# EAGLE board SCRIPPS_new_board_ (EAGLE 8.2.2)
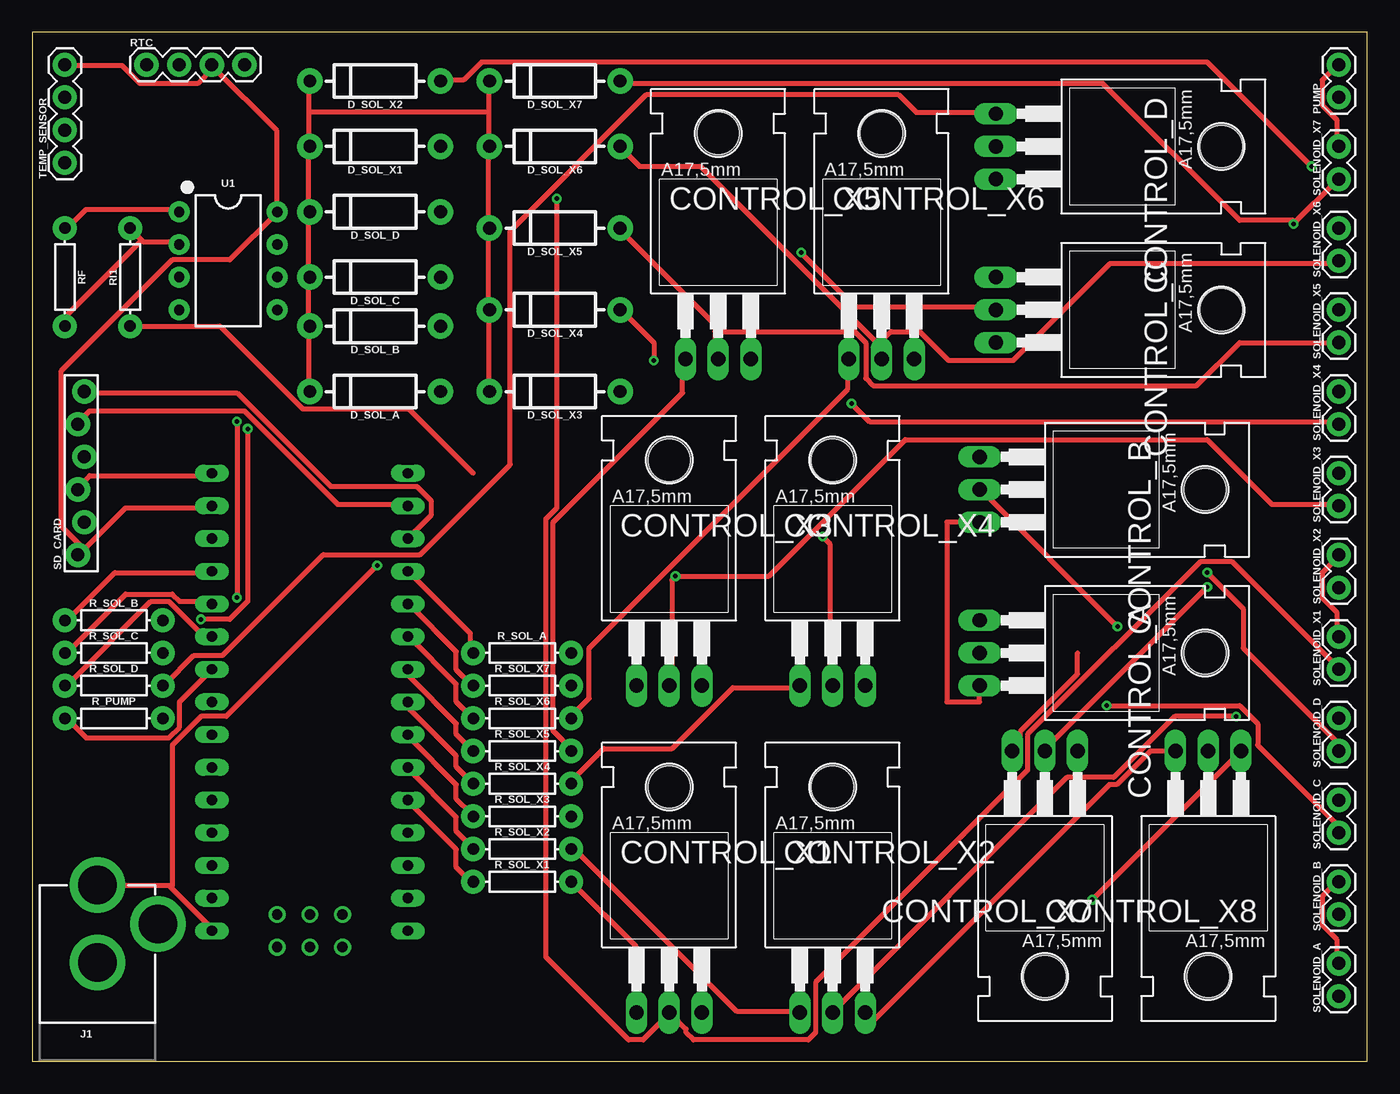
[diagram p0: board, top side]
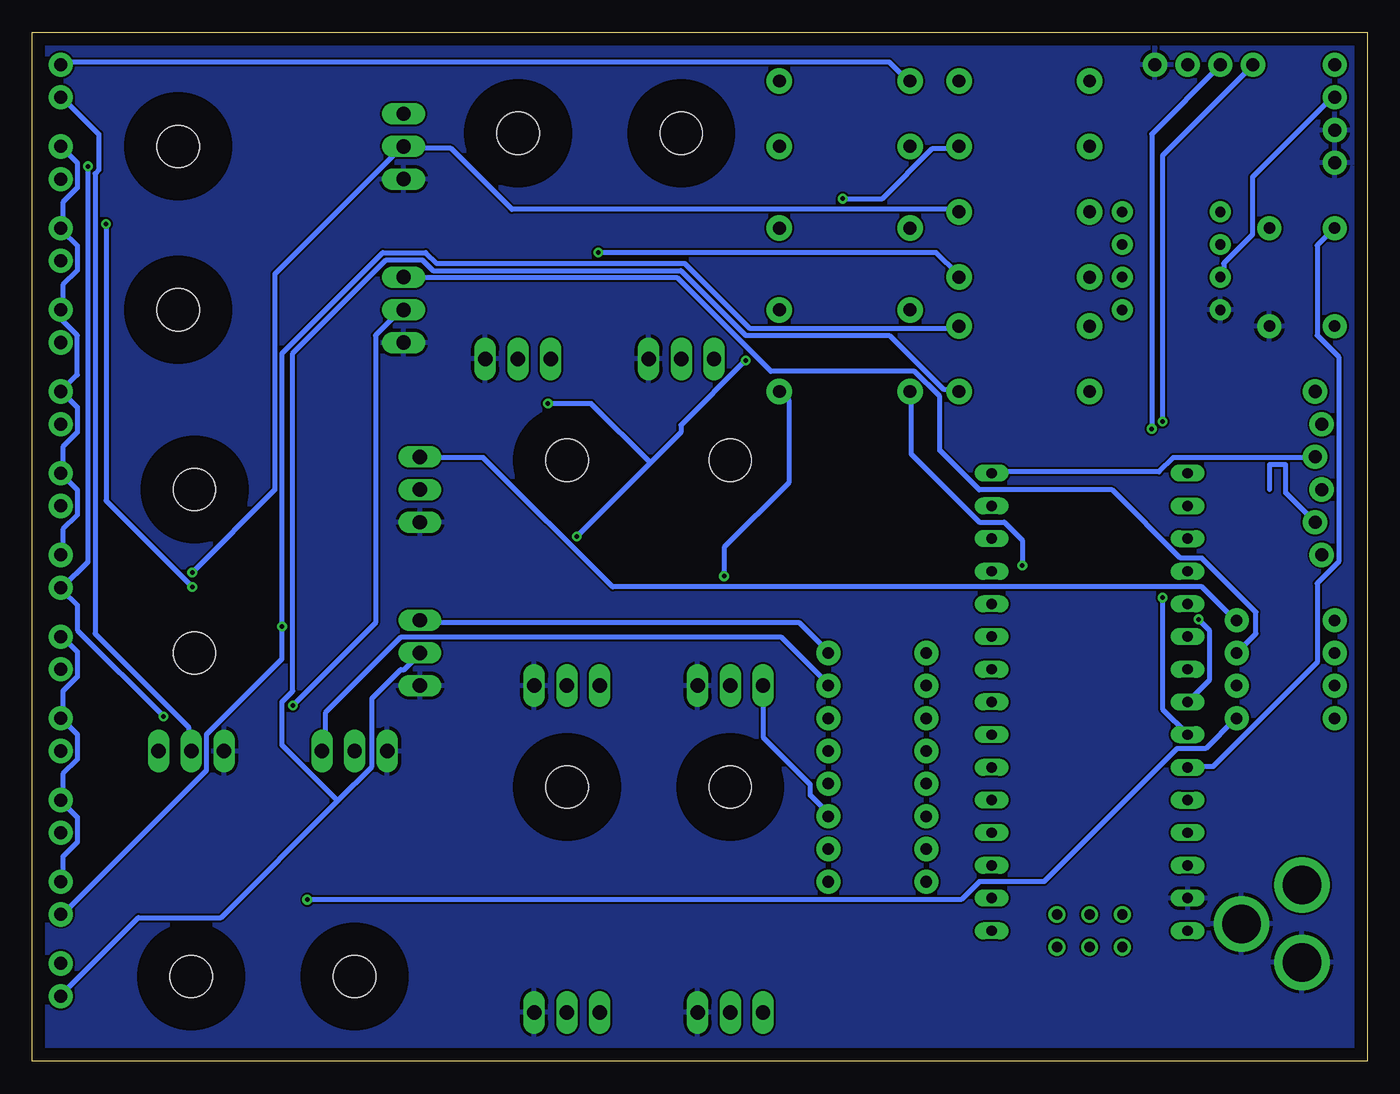
[diagram p1: board, bottom side, seen from below]

Size 103.81 x 80 mm. Coordinates in mm from the lower left corner, seen from the top.
Outline: 0,0 103.81,0 103.81,80 0,80 0,0
Copper layers (1*16): Top 0.035mm / dielectric 1.5mm / Bottom 0.035mm
Design rules "default": minimum track width 6mil, minimum drill 0.35mm, track to track 6mil, track to pad 6mil, pad to pad 6mil, via to via 6mil, smd to smd 6mil, copper to edge 40mil, drill to drill 6mil, minimum pad ring 10mil, minimum via ring 8mil, stop-mask expansion 4mil, vias tented up to drill 0mil, thermal gap 10mil
Net classes: 0 edit1: width 0.406 mm

## Footprints (pad centres in the part's own frame; a part is rotated, then mirrored left to right if it is on the bottom)
TO220AH = drill 1.118 long: B -2.54,-6.35; C 0,-6.35; E 2.54,-6.35 | hole 3.302: 0,11.176
DIODE-1N4001 = drill 1 pad 1.981: A -5.08,0; C 5.08,0
POWER_JACK_PTH = drill 2.997 pad 4.318: GND 0,7.7; GNDBREAK 4.7,10.7; PWR 0,13.7
1X02 = drill 1.016 pad 1.88: 1 0,0; 2 2.54,0
AXIAL-0.3 = drill 0.9 pad 1.88: P$1 -3.81,0; P$2 3.81,0
1X04 = drill 1.016 pad 1.88: 1 0,0; 2 2.54,0; 3 5.08,0; 4 7.62,0
1X06_FEMALE_LOCK.010 = drill 1.016 pad 1.88: 1 0,0.254; 2 2.54,-0.254; 3 5.08,0.254; 4 7.62,-0.254; 5 10.16,0.254; 6 12.7,-0.254
DIP08 = drill 0.813 pad 1.626: 1 -3.81,-3.81; 2 -1.27,-3.81; 3 1.27,-3.81; 4 3.81,-3.81; 5 3.81,3.81; 6 1.27,3.81; 7 -1.27,3.81; 8 -3.81,3.81
NANO = drill 0.8 long: 3.3V -10.16,24.13; 5V -10.16,-1.27; A0 -10.16,19.05; A1 -10.16,16.51; A2 -10.16,13.97; A3 -10.16,11.43; A4 -10.16,8.89; A5 -10.16,6.35; A6 -10.16,3.81; A7 -10.16,1.27; AREF -10.16,21.59; D2 5.08,1.27; D3 5.08,3.81; D4 5.08,6.35; D5 5.08,8.89; D6 5.08,11.43; D7 5.08,13.97; D8 5.08,16.51; D9 5.08,19.05; D10 5.08,21.59; D11 5.08,24.13; D12 5.08,26.67; D13 -10.16,26.67; GND -10.16,-6.35; GND1 5.08,-1.27; RAW -10.16,-8.89; RST -10.16,-3.81; RST1 5.08,-3.81; RX1 5.08,-6.35; TX0 5.08,-8.89 | drill 0.8: ICSP1 -5.08,-10.16; ICSP2 -5.08,-7.62; ICSP3 -2.54,-10.16; ICSP4 -2.54,-7.62; ICSP5 0,-10.16; ICSP6 0,-7.62

## Placement (x,y rotation side)
CONTROL_A  TIP120  [TO220AH]  80.01,31.75 270 top
CONTROL_B  TIP120  [TO220AH]  80.01,44.45 270 top
CONTROL_C  TIP120  [TO220AH]  81.28,58.42 270 top
CONTROL_D  TIP120  [TO220AH]  81.28,71.12 270 top
CONTROL_X1  TIP120  [TO220AH]  49.53,10.16 0 top
CONTROL_X2  TIP120  [TO220AH]  62.23,10.16 0 top
CONTROL_X3  TIP120  [TO220AH]  49.53,35.56 0 top
CONTROL_X4  TIP120  [TO220AH]  62.23,35.56 0 top
CONTROL_X5  TIP120  [TO220AH]  53.34,60.96 0 top
CONTROL_X6  TIP120  [TO220AH]  66.04,60.96 0 top
CONTROL_X7  TIP120  [TO220AH]  78.74,17.78 180 top
CONTROL_X8  TIP120  [TO220AH]  91.44,17.78 180 top
D_SOL_A  1A/50V/1.1V  [DIODE-1N4001]  26.67,52.07 180 top
D_SOL_B  1A/50V/1.1V  [DIODE-1N4001]  26.67,57.15 180 top
D_SOL_C  1A/50V/1.1V  [DIODE-1N4001]  26.67,60.96 180 top
D_SOL_D  1A/50V/1.1V  [DIODE-1N4001]  26.67,66.04 180 top
D_SOL_X1  1A/50V/1.1V  [DIODE-1N4001]  26.67,71.12 180 top
D_SOL_X2  1A/50V/1.1V  [DIODE-1N4001]  26.67,76.2 180 top
D_SOL_X3  1A/50V/1.1V  [DIODE-1N4001]  40.64,52.07 180 top
D_SOL_X4  1A/50V/1.1V  [DIODE-1N4001]  40.64,58.42 180 top
D_SOL_X5  1A/50V/1.1V  [DIODE-1N4001]  40.64,64.77 180 top
D_SOL_X6  1A/50V/1.1V  [DIODE-1N4001]  40.64,71.12 180 top
D_SOL_X7  1A/50V/1.1V  [DIODE-1N4001]  40.64,76.2 180 top
J1  POWER_JACK  [POWER_JACK_PTH]  5.08,0 0 top
PUMP  [1X02]  101.6,74.93 90 top
R_PUMP  330  [AXIAL-0.3]  6.35,26.67 0 top
R_SOL_A  330  [AXIAL-0.3]  38.1,31.75 0 top
R_SOL_B  330  [AXIAL-0.3]  6.35,34.29 0 top
R_SOL_C  330  [AXIAL-0.3]  6.35,31.75 0 top
R_SOL_D  330  [AXIAL-0.3]  6.35,29.21 0 top
R_SOL_X1  330  [AXIAL-0.3]  38.1,13.97 0 top
R_SOL_X2  330  [AXIAL-0.3]  38.1,16.51 0 top
R_SOL_X3  330  [AXIAL-0.3]  38.1,19.05 0 top
R_SOL_X4  330  [AXIAL-0.3]  38.1,21.59 0 top
R_SOL_X5  330  [AXIAL-0.3]  38.1,24.13 0 top
R_SOL_X6  330  [AXIAL-0.3]  38.1,26.67 0 top
R_SOL_X7  330  [AXIAL-0.3]  38.1,29.21 0 top
RF  22k  [AXIAL-0.3]  2.54,60.96 270 top
RI1  2.2k  [AXIAL-0.3]  7.62,60.96 90 top
RTC  [1X04]  8.89,77.47 0 top
SD_CARD  [1X06_FEMALE_LOCK.010]  3.81,39.37 90 top
SOLENOID_A  [1X02]  101.6,5.08 90 top
SOLENOID_B  [1X02]  101.6,11.43 90 top
SOLENOID_C  [1X02]  101.6,17.78 90 top
SOLENOID_D  [1X02]  101.6,24.13 90 top
SOLENOID_X1  [1X02]  101.6,30.48 90 top
SOLENOID_X2  [1X02]  101.6,36.83 90 top
SOLENOID_X3  [1X02]  101.6,43.18 90 top
SOLENOID_X4  [1X02]  101.6,49.53 90 top
SOLENOID_X5  [1X02]  101.6,55.88 90 top
SOLENOID_X6  [1X02]  101.6,62.23 90 top
SOLENOID_X7  [1X02]  101.6,68.58 90 top
TEMP_SENSOR  [1X04]  2.54,69.85 90 top
U1  LM358  [DIP08]  15.24,62.23 270 top
U$2  NANO  [NANO]  24.13,19.05 0 top

## Library data of the parts
CONTROL_A CONTROL_B CONTROL_C CONTROL_D CONTROL_X1-CONTROL_X8 = transistor-power
D_SOL_A D_SOL_B D_SOL_C D_SOL_D D_SOL_X1-D_SOL_X7 = SparkFun-DiscreteSemi; PROD_ID: DIO-09176
J1 = SparkFun-Connectors; PROD_ID: CONN-08197
PUMP SD_CARD SOLENOID_A SOLENOID_B SOLENOID_C SOLENOID_D SOLENOID_X1-SOLENOID_X7 = SparkFun-Connectors
R_PUMP R_SOL_A R_SOL_B R_SOL_C R_SOL_D R_SOL_X1-R_SOL_X7 RF RI1 = SparkFun-Resistors; PROD_ID: RES-8371
RTC TEMP_SENSOR = SparkFun-Connectors; PROD_ID: CONN-09696
U1 = SparkFun-IC-Amplifiers; PROD_ID: IC-09172
U$2 = Arduino-clone

## Nets
3.3V: RTC.3 SD_CARD.1 TEMP_SENSOR.4 U1.8 U$2.3.3V
A: R_SOL_A.P$1 U$2.D9
B: R_SOL_B.P$1 U$2.A0
C: R_SOL_C.P$1 U$2.A1
CLK: SD_CARD.3 U$2.D13
CS: SD_CARD.6 U$2.D10
D: R_SOL_D.P$1 U$2.A2
DI: SD_CARD.5 U$2.D11
DO: SD_CARD.4 U$2.D12
GND: CONTROL_A.E CONTROL_B.E CONTROL_C.E CONTROL_D.E CONTROL_X1.E CONTROL_X2.E CONTROL_X3.E CONTROL_X4.E CONTROL_X5.E CONTROL_X6.E CONTROL_X7.E CONTROL_X8.E J1.GND J1.GNDBREAK RI1.P$1 RTC.4 TEMP_SENSOR.1 TEMP_SENSOR.2 U1.4 U$2.GND
N$1: SD_CARD.2
N$2: CONTROL_X8.B R_PUMP.P$2
N$3: CONTROL_X8.C PUMP.1
N$4: CONTROL_X1.C D_SOL_X1.A SOLENOID_X1.1
N$5: CONTROL_X1.B R_SOL_X1.P$2
N$6: CONTROL_C.B R_SOL_C.P$2
N$9: CONTROL_A.B R_SOL_A.P$2
N$10: CONTROL_A.C D_SOL_A.A SOLENOID_A.1
N$11: CONTROL_C.C D_SOL_C.A SOLENOID_C.1
N$12: RF.P$2 RI1.P$2 U1.2
N$13: CONTROL_B.B R_SOL_B.P$2
N$14: CONTROL_B.C D_SOL_B.A SOLENOID_B.1
N$17: CONTROL_D.B R_SOL_D.P$2
N$18: CONTROL_D.C D_SOL_D.A SOLENOID_D.1
N$19: CONTROL_X5.B R_SOL_X5.P$2
N$20: CONTROL_X2.C D_SOL_X2.A SOLENOID_X2.1
N$21: CONTROL_X7.B R_SOL_X7.P$2
N$22: CONTROL_X7.C D_SOL_X7.A SOLENOID_X7.1
N$23: CONTROL_X5.C D_SOL_X5.A SOLENOID_X5.1
N$25: CONTROL_X4.B R_SOL_X4.P$2
N$26: CONTROL_X4.C D_SOL_X4.A SOLENOID_X4.1
N$29: CONTROL_X2.B R_SOL_X2.P$2
N$33: CONTROL_X3.B R_SOL_X3.P$2
N$34: CONTROL_X3.C D_SOL_X3.A SOLENOID_X3.1
N$36: CONTROL_X6.B R_SOL_X6.P$2
N$37: CONTROL_X6.C D_SOL_X6.A SOLENOID_X6.1
POWER: D_SOL_A.C D_SOL_B.C D_SOL_C.C D_SOL_D.C D_SOL_X1.C D_SOL_X2.C D_SOL_X3.C D_SOL_X4.C D_SOL_X5.C D_SOL_X6.C D_SOL_X7.C J1.PWR PUMP.2 SOLENOID_A.2 SOLENOID_B.2 SOLENOID_C.2 SOLENOID_D.2 SOLENOID_X1.2 SOLENOID_X2.2 SOLENOID_X3.2 SOLENOID_X4.2 SOLENOID_X5.2 SOLENOID_X6.2 SOLENOID_X7.2 U$2.RAW
PUMP_ARD: R_PUMP.P$1 U$2.A3
SCL: RTC.1 U$2.A5
SDA: RTC.2 U$2.A4
TEMP_SENSOR: RF.P$1 U1.1 U$2.A6
TS1: TEMP_SENSOR.3 U1.3
X1: R_SOL_X1.P$1 U$2.D2
X2: R_SOL_X2.P$1 U$2.D3
X3: R_SOL_X3.P$1 U$2.D4
X4: R_SOL_X4.P$1 U$2.D5
X5: R_SOL_X5.P$1 U$2.D6
X6: R_SOL_X6.P$1 U$2.D7
X7: R_SOL_X7.P$1 U$2.D8

## Tracks (layer width: path | path; a pad name or v marks a point on that pad's centre or on a via)
3.3V
  Top 0.406: U$2.3.3V 13.97,43.03 7.26,43.03 3.63,39.4 SD_CARD.1 3.91,39.95 2.23,41.63 2.23,53.65 10.9,62.31 15.37,62.31 19,65.94 U1.8 19,66.22 19,72.36 13.97,77.39 RTC.3 13.97,77.11 12.85,76 8.38,76 6.99,77.39 2.79,77.39 TEMP_SENSOR.4
A
  Top 0.406: U$2.D9 29.34,38 34.09,33.25 34.09,31.85 R_SOL_A.P$1
B
  Top 0.406: U$2.A0 13.97,38 6.43,38 2.79,34.37 R_SOL_B.P$1
C
  Top 0.406: U$2.A1 13.97,35.76 11.46,35.76 10.9,36.32 7.26,36.32 2.79,31.85 R_SOL_C.P$1
CLK
  Top 0.406: U$2.D13 13.97,45.54 4.47,45.54 3.63,44.7 SD_CARD.3
CS
  Top 0.406: U$2.D10 29.34,40.79 31.01,42.47 31.01,43.59 29.9,44.7 23.19,44.7 15.93,51.97 4.19,51.97 SD_CARD.6
D
  Top 0.406: U$2.A2 13.97,33.25 13.13,33.25 10.62,35.76 9.22,35.76 2.79,29.34 R_SOL_D.P$1
DI
  Top 0.406: U$2.D11 29.06,43.31 23.75,43.31 16.48,50.57 4.47,50.57 3.63,49.73 SD_CARD.5
DO
  Bottom 0.406: U$2.D12 29.06,45.82 16.2,45.82 15.09,46.94 4.19,46.94 SD_CARD.4
GND
  Top 0.406: CONTROL_B.E 71.12,41.91 71.12,27.94 73.66,27.94 CONTROL_A.E | 81.28,31.75 81.28,30.1 76.83,25.66 76.83,24.77 CONTROL_X7.E | RI1.P$1 14.61,57.15 21.03,50.72 29.29,50.72 34.29,45.72 | CONTROL_X8.E 86.95,24.13 84.33,21.51 83.74,21.51 64.77,2.54 CONTROL_X2.E
  pour Bottom: 0,80.01 104.14,80.01 104.14,0 0,0
N$1
  Bottom 0.406: 7.62,44.45 7.62,46.38 6.35,46.38 6.35,44.2 SD_CARD.2
N$2  (via drill 0.35)
  Top 0.406: v82.42,12.57 CONTROL_X8.B
  Bottom 0.406: v82.42,12.57 31.57,12.57 30.18,13.97 25.15,13.97 14.81,24.31 12.57,24.31 10.34,26.54 R_PUMP.P$2
N$3
  Bottom 0.406: CONTROL_X8.C 91.64,24.31 91.64,25.98 98.91,33.25 98.91,69.01 98.63,69.29 98.63,72.08 101.42,74.88 PUMP.1
N$4  (via drill 0.35)
  Top 0.406: SOLENOID_X1.1 101.42,30.73 93.32,38.84 90.81,38.84 77.39,25.43 77.39,22.63 60.91,6.15 60.91,2.23 60.35,1.68 51.41,1.68 50.85,2.23 50.85,2.52 49.73,3.63 CONTROL_X1.C 49.45,3.63 47.5,1.68 46.38,1.68 39.95,8.1 39.95,42.19 40.79,43.03 v40.79,67.06
  Bottom 0.406: v40.79,67.06 37.72,67.06 33.81,70.97 31.85,70.97 D_SOL_X1.A
N$5
  Top 0.406: R_SOL_X1.P$2 46.94,8.94 46.94,3.91 CONTROL_X1.B
N$6
  Bottom 0.406: R_SOL_C.P$2 8.66,33.25 8.66,34.92 12.85,39.12 14.53,39.12 19.84,44.42 30.18,44.42 33.25,47.5 33.25,51.69 35.2,53.65 46.38,53.65 53.65,60.91 74.88,60.91 CONTROL_C.B
N$9
  Bottom 0.406: CONTROL_A.B 73.48,34.09 44.15,34.09 41.91,31.85 R_SOL_A.P$2
N$10
  Bottom 0.406: 80.05,20.26 89.13,11.18 95.56,11.18 101.42,5.31 SOLENOID_A.1 | 80.05,20.26 77.39,22.91 77.39,28.22 75.16,30.45 74.88,30.45 73.76,31.57 CONTROL_A.C | 80.05,20.26 84.38,24.59 84.38,27.94 83.54,28.78 83.54,55.04 76.28,62.31 73.48,62.31 72.64,61.47 53.37,61.47 48.34,56.44 37.16,56.44 32.97,52.25 31.85,52.25 D_SOL_A.A
N$11  (via drill 0.35)
  Top 0.406: v59.79,62.87 63.98,58.67 74.88,58.67 CONTROL_C.C | v83.54,27.66 93.88,27.66 95.28,26.26 95.28,24.59 101.42,18.44 101.42,17.88 SOLENOID_C.1
  Bottom 0.406: v59.79,62.87 33.53,62.87 31.85,61.19 D_SOL_C.A | v83.54,27.66 77.11,34.09 77.11,56.44 75.16,58.4 CONTROL_C.C
N$12
  Top 0.406: 8.52,63.84 7.82,64.54 RI1.P$2 | 8.52,63.84 8.66,63.7 11.18,63.7 U1.2 | 8.52,63.84 2.79,58.12 2.79,57.28 RF.P$2
N$13
  Bottom 0.406: CONTROL_B.B 73.48,46.94 68.73,46.94 58.67,36.88 12.85,36.88 10.34,34.37 R_SOL_B.P$2
N$14  (via drill 0.35)
  Top 0.406: v84.38,33.81 73.76,44.42 CONTROL_B.C
  Bottom 0.406: SOLENOID_B.1 101.42,11.46 90.25,22.63 90.25,25.43 84.38,31.29 v84.38,33.81 84.38,55.04 76.56,62.87 73.2,62.87 72.36,62.03 53.09,62.03 48.06,57 31.85,57 D_SOL_B.A
N$17
  Top 0.406: CONTROL_D.B 74.88,73.76 68.73,73.76 67.33,75.16 47.78,75.16 37.16,64.54 37.16,46.38 30.18,39.4 22.63,39.4 14.81,31.57 12.57,31.57 10.34,29.34 R_SOL_D.P$2
N$18  (via drill 0.35)
  Top 0.406: v91.36,38 94.16,35.2 94.16,32.13 101.42,24.87 101.42,24.31 SOLENOID_D.1
  Bottom 0.406: D_SOL_D.A 31.85,66.22 66.5,66.22 71.25,70.97 74.88,70.97 CONTROL_D.C 75.16,70.97 84.94,61.19 84.94,44.42 v91.36,38
N$19
  Top 0.406: CONTROL_X5.B 50.57,54.48 50.57,51.97 40.51,41.91 40.51,25.7 41.91,24.31 R_SOL_X5.P$2
N$20  (via drill 0.35)
  Top 0.406: v93.6,26.82 88.85,26.82 84.1,22.07 80.47,22.07 62.31,3.91 CONTROL_X2.C | v99.47,69.57 91.36,77.67 34.92,77.67 33.53,76.28 31.85,76.28 D_SOL_X2.A
  Bottom 0.406: v93.6,26.82 100.31,33.53 100.31,35.48 101.42,36.6 SOLENOID_X2.1 101.42,36.88 99.47,38.84 v99.47,69.57
N$21
  Bottom 0.406: CONTROL_X7.B 81.03,24.31 81.03,27.1 75.16,32.97 45.54,32.97 41.91,29.34 R_SOL_X7.P$2
N$22  (via drill 0.35)
  Top 0.406: v91.36,36.88 78.79,24.31 CONTROL_X7.C | SOLENOID_X7.1 101.42,68.45 v98.07,65.1 98.07,65.38 93.88,65.38 83.26,76 45.82,76 D_SOL_X7.A
  Bottom 0.406: v91.36,36.88 98.07,43.59 v98.07,65.1
N$23
  Top 0.406: 53.09,56.72 53.09,57.28 45.82,64.54 D_SOL_X5.A | 53.09,56.72 53.09,54.76 CONTROL_X5.C | SOLENOID_X5.1 93.88,55.88 90.53,52.53 65.38,52.53 64.82,53.09 64.82,55.88 63.98,56.72 53.09,56.72
N$25
  Top 0.406: CONTROL_X4.B 59.51,29.06 54.48,29.06 49.73,24.31 44.42,24.31 41.91,21.79 R_SOL_X4.P$2
N$26  (via drill 0.35)
  Top 0.406: v61.47,40.79 62.03,40.23 62.03,29.34 CONTROL_X4.C | v48.34,54.48 48.34,55.88 45.82,58.4 D_SOL_X4.A | v63.7,51.13 65.1,49.73 101.42,49.73 SOLENOID_X4.1
  Bottom 0.406: 55.74,46.52 53.37,48.9 53.37,49.45 v48.34,54.48 | 55.74,46.52 v61.47,40.79 | v63.7,51.13 60.35,51.13 55.74,46.52
N$29
  Top 0.406: CONTROL_X2.B 59.51,3.91 54.76,3.91 41.91,16.76 R_SOL_X2.P$2
N$33
  Bottom 0.406: CONTROL_X3.B 46.94,29.06 46.94,25.15 43.31,21.51 43.31,20.68 41.91,19.28 R_SOL_X3.P$2
N$34  (via drill 0.35)
  Top 0.406: CONTROL_X3.C 49.73,29.34 49.73,37.44 v50.01,37.72 57.28,37.72 67.89,48.34 91.36,48.34 96.39,43.31 101.42,43.31 SOLENOID_X3.1
  Bottom 0.406: v50.01,37.72 50.01,39.95 44.98,44.98 44.98,51.41 45.54,51.97 D_SOL_X3.A
N$36
  Top 0.406: CONTROL_X6.B 63.42,54.48 63.42,52.25 43.31,32.13 43.31,28.22 41.91,26.82 R_SOL_X6.P$2
N$37
  Top 0.406: D_SOL_X6.A 45.82,70.97 47.22,69.57 51.97,69.57 65.94,55.6 65.94,54.76 CONTROL_X6.C 65.94,55.88 66.78,56.72 69.01,56.72 71.25,54.48 76.28,54.48 83.82,62.03 101.42,62.03 SOLENOID_X6.1
POWER  (via drill 0.35)
  Top 0.406: SOLENOID_X7.2 101.42,71.25 101.42,73.2 100.31,74.32 100.31,76.28 101.42,77.39 PUMP.2 | SOLENOID_A.2 101.42,7.82 101.42,9.5 100.31,10.62 100.31,12.85 101.42,13.97 SOLENOID_B.2 | SOLENOID_X1.2 101.42,33.25 101.42,34.92 100.31,36.04 100.31,38 101.42,39.12 SOLENOID_X2.2 | 21.51,73.76 21.51,76 D_SOL_X2.C | 21.51,73.76 21.51,71.25 D_SOL_X1.C 21.51,70.97 21.51,66.22 D_SOL_D.C 21.51,65.94 21.51,61.19 D_SOL_C.C 21.51,60.91 21.51,57.28 D_SOL_B.C 21.51,57 21.51,52.25 D_SOL_A.C | 10.76,13.55 10.62,13.69 5.31,13.69 J1.PWR | 10.76,13.55 13.97,10.34 U$2.RAW | 35.48,73.76 35.48,76 D_SOL_X7.C | 35.48,73.76 35.48,71.25 D_SOL_X6.C 35.48,70.97 35.48,64.82 D_SOL_X5.C 35.48,64.54 35.48,58.67 D_SOL_X4.C 35.48,58.4 35.48,52.25 D_SOL_X3.C | v26.82,38.56 15.09,26.82 13.13,26.82 10.9,24.59 10.9,13.69 10.76,13.55 | 35.48,73.76 21.51,73.76
  Bottom 0.406: SOLENOID_X7.2 101.42,70.97 100.31,69.85 100.31,67.89 101.42,66.78 101.42,64.82 SOLENOID_X6.2 101.42,64.54 100.31,63.42 100.31,61.47 101.42,60.35 101.42,58.67 SOLENOID_X5.2 101.42,58.4 101.42,57.56 100.31,56.44 100.31,53.37 SOLENOID_X4.2 101.42,51.97 100.31,50.85 100.31,48.9 101.42,47.78 101.42,45.82 SOLENOID_X3.2 100.31,44.42 100.31,42.47 101.42,41.35 101.42,39.4 SOLENOID_X2.2 | SOLENOID_B.2 101.42,13.97 101.42,15.93 100.31,17.04 100.31,19 101.42,20.12 SOLENOID_C.2 101.42,20.4 101.42,22.35 100.31,23.47 100.31,25.43 101.42,26.54 SOLENOID_D.2 101.42,26.82 101.42,28.78 100.31,29.9 100.31,31.85 101.42,32.97 SOLENOID_X1.2 | v26.82,38.56 26.82,40.51 28.22,41.91 30.18,41.91 35.48,47.22 35.48,51.97 D_SOL_X3.C | PUMP.2 101.42,77.67 37.16,77.67 35.76,76.28 D_SOL_X7.C
PUMP_ARD
  Top 0.406: U$2.A3 13.97,30.45 11.46,27.94 11.46,25.98 10.62,25.15 4.19,25.15 2.79,26.54 R_PUMP.P$1
SCL  (via drill 0.35)
  Top 0.406: v15.93,49.73 v15.93,36.04
  Bottom 0.406: v15.93,36.04 15.93,27.38 13.97,25.43 U$2.A5 | v15.93,49.73 15.93,70.41 8.94,77.39 RTC.1
SDA  (via drill 0.35)
  Top 0.406: v13.13,34.37 15.37,34.37 16.76,35.76 v16.76,49.17
  Bottom 0.406: U$2.A4 12.29,29.62 12.29,33.53 v13.13,34.37 | v16.76,49.17 16.76,72.08 11.46,77.39 RTC.2
TEMP_SENSOR
  Top 0.406: U1.1 11.18,66.22 4.19,66.22 2.79,64.82 RF.P$1
  Bottom 0.406: U$2.A6 13.97,22.91 12.01,22.91 3.91,31.01 3.91,37.16 2.23,38.84 2.23,54.76 3.91,56.44 3.91,63.42 2.79,64.54 RF.P$1
TS1
  Bottom 0.406: U1.3 11.18,61.19 11.18,62.03 8.94,64.26 8.94,68.73 2.79,74.88 TEMP_SENSOR.3
X1
  Top 0.406: U$2.D2 29.34,20.12 32.97,16.48 32.97,15.09 34.09,13.97 R_SOL_X1.P$1
X2
  Top 0.406: U$2.D3 29.34,22.63 32.97,19 32.97,17.88 34.09,16.76 R_SOL_X2.P$1
X3
  Top 0.406: U$2.D4 29.34,25.15 32.97,21.51 32.97,20.4 34.09,19.28 R_SOL_X3.P$1
X4
  Top 0.406: R_SOL_X4.P$1 32.97,22.91 32.97,23.75 29.34,27.38 29.34,27.94 U$2.D5
X5
  Top 0.406: U$2.D6 29.34,30.45 29.34,29.9 32.97,26.26 32.97,25.43 34.09,24.31 R_SOL_X5.P$1
X6
  Top 0.406: U$2.D7 29.34,32.97 32.97,29.34 32.97,27.94 34.09,26.82 R_SOL_X6.P$1
X7
  Top 0.406: U$2.D8 29.34,35.48 32.97,31.85 32.97,30.45 34.09,29.34 R_SOL_X7.P$1